# EAGLE board modbrainsv0.3x (EAGLE 7.1.0)

Size 63.17 x 80 mm. Coordinates in mm from the lower left corner, seen from the top.
Outline: 0,0 63.17,0 63.17,80 0,80 0,0
Copper layers (1*16): Top 0.035mm / dielectric 1.5mm / Bottom 0.035mm
Design rules "default": minimum track width 10mil, minimum drill 24mil, track to track 8mil, track to pad 8mil, pad to pad 8mil, via to via 8mil, smd to smd 8mil, copper to edge 40mil, drill to drill 8mil, minimum pad ring 10mil, minimum via ring 8mil, stop-mask expansion 4mil, vias tented up to drill 0mil, thermal gap 10mil
Net classes: 0 default: width 0.254 mm, drill 0.051 mm, clearance 0.254 mm

## Footprints (pad centres in the part's own frame; a part is rotated, then mirrored left to right if it is on the bottom)
2,54/1,1 = drill 1.118 pad 2.54 octagon: 1 0,0
0603-CAP = smd 1.1 x 1: 1 -0.85,0; 2 0.85,0
1206 = smd 1.6 x 1.8: 1 -1.4,0; 2 1.4,0
SMA-DIODE = smd 1.27 x 1.47: A -2.15,0; C 2.15,0
SOD-323 = smd 0.63 x 0.83: A 1.15,0; C -1.15,0
JST-2-SMD = smd 1 x 4.6: 1 -1,-3.7; 2 1,-3.7 | smd 1.6 x 3.4: NC1 -3.4,1.5; NC2 3.4,1.5
USB-B-MICRO-SMD_V03 = smd 1.4 x 0.4: D+1 2.7,0; D-1 2.7,0.65; GND1 2.7,-1.3; ID1 2.7,-0.65; VBUS1 2.7,1.3 | smd 1.5 x 1.8: SHIELD1 0,3.7; SHIELD2 0,-3.7 | smd 1.5 x 2.5: SHIELD3 0,0 | hole 0.85: 2.2,1.9; 2.2,-1.9
SOT23-3 = smd 0.8 x 0.9: 1 -0.95,-1; 2 0.95,-1; 3 0,1.1
0603-RES = smd 1.1 x 1: 1 -0.85,0; 2 0.85,0
SSOP16-PRACTICE = smd 0.4 x 1.5: 1 -2.223,-2.578; 2 -1.587,-2.578; 3 -0.953,-2.578; 4 -0.318,-2.578; 5 0.318,-2.578; 6 0.953,-2.578; 7 1.587,-2.578; 8 2.223,-2.578; 9 2.223,2.578; 10 1.587,2.578; 11 0.953,2.578; 12 0.318,2.578; 13 -0.318,2.578; 14 -0.953,2.578; 15 -1.587,2.578; 16 -2.223,2.578
SOT23-5 = smd 0.55 x 1.2: 1 -0.95,-1.3; 2 0,-1.3; 3 0.95,-1.3; 4 0.95,1.3; 5 -0.95,1.3
TQFP44 = smd 1.5 x 0.5: 1 -5.8,4; 2 -5.8,3.2; 3 -5.8,2.4; 4 -5.8,1.6; 5 -5.8,0.8; 6 -5.8,0; 7 -5.8,-0.8; 8 -5.8,-1.6; 9 -5.8,-2.4; 10 -5.8,-3.2; 11 -5.8,-4; 23 5.8,-4; 24 5.8,-3.2; 25 5.8,-2.4; 26 5.8,-1.6; 27 5.8,-0.8; 28 5.8,0; 29 5.8,0.8; 30 5.8,1.6; 31 5.8,2.4; 32 5.8,3.2; 33 5.8,4 | smd 0.5 x 1.5: 12 -4,-5.8; 13 -3.2,-5.8; 14 -2.4,-5.8; 15 -1.6,-5.8; 16 -0.8,-5.8; 17 0,-5.8; 18 0.8,-5.8; 19 1.6,-5.8; 20 2.4,-5.8; 21 3.2,-5.8; 22 4,-5.8; 34 4,5.8; 35 3.2,5.8; 36 2.4,5.8; 37 1.6,5.8; 38 0.8,5.8; 39 0,5.8; 40 -0.8,5.8; 41 -1.6,5.8; 42 -2.4,5.8; 43 -3.2,5.8; 44 -4,5.8
CRYSTAL-SMD-5X3 = smd 1.9 x 1.1: 1 -1.85,-1.15; 2 1.85,-1.15; 3 1.85,1.15; 4 -1.85,1.15

## Placement (x,y rotation side)
1+  [2,54/1,1]  54.61,40.64 0 top
1-  [2,54/1,1]  54.61,38.1 0 top
2+  [2,54/1,1]  54.61,35.56 0 top
2-  [2,54/1,1]  54.61,33.02 0 top
3+  [2,54/1,1]  54.61,30.48 0 top
3-  [2,54/1,1]  54.61,27.94 0 top
A2  [2,54/1,1]  36.83,59.69 0 top
A3  [2,54/1,1]  34.29,59.69 0 top
BTN  [2,54/1,1]  43.18,21.59 0 top
C1  1.0uF  [0603-CAP]  10.16,40.01 180 top
C2  22pF  [0603-CAP]  22.86,27.56 180 top
C3  22pF  [0603-CAP]  19.05,27.56 180 top
C4  0.1uF  [0603-CAP]  13.97,26.67 0 top
C5  0.1uF  [0603-CAP]  27.94,48.26 0 top
C6  0.1uF  [0603-CAP]  31.75,36.83 0 top
C7  4.7uF  [0603-CAP]  20.32,52.07 0 top
C8  4.7uF  [1206]  2.54,46.99 180 top
C9  470pF  [0603-CAP]  21.59,54.61 0 top
C10  4.7uF  [1206]  43.18,46.99 180 top
C11  0.1uF  [0603-CAP]  50.8,39.37 270 top
C12  0.1uF  [0603-CAP]  50.8,35.56 270 top
C13  0.1uF  [0603-CAP]  50.8,31.75 270 top
CHG+  [2,54/1,1]  1.27,52.07 0 top
CHG-  [2,54/1,1]  1.27,54.61 0 top
D1  B340A  [SMA-DIODE]  15.24,54.61 0 top
D2  BAT20JFILM  [SOD-323]  48.26,39.37 270 top
D3  BAT20JFILM  [SOD-323]  48.26,35.56 270 top
D4  1N914BWS  [SOD-323]  48.26,31.75 270 top
FRAME1  FRAME-LETTER  [CREATIVE_COMMONS]  21.59,-22.86 0 top  (outside the outline)
GND  [2,54/1,1]  1.27,27.94 0 top
GND13  [2,54/1,1]  34.29,10.16 0 top
GND15  [2,54/1,1]  38.1,10.16 0 top
GND17  [2,54/1,1]  41.91,10.16 0 top
GND19  [2,54/1,1]  45.72,10.16 0 top
J1  [JST-2-SMD]  53.34,46.99 270 top
JP4  USB  [USB-B-MICRO-SMD_V03]  2.54,40.64 0 top
LED+  [2,54/1,1]  35.56,43.18 0 top
OUT1  [2,54/1,1]  35.56,19.05 0 top
OUT2  [2,54/1,1]  38.1,20.32 0 top
Q1  [SOT23-3]  44.45,39.37 270 top
Q2  [SOT23-3]  44.45,35.56 270 top
Q3  [SOT23-3]  44.45,31.75 270 top
R1  10k  [0603-RES]  8.89,36.83 0 top
R2  430  [0603-RES]  31.75,43.18 0 top
R3  430  [0603-RES]  15.24,31.75 0 top
R4  430  [0603-RES]  27.94,59.69 0 top
R5  22  [0603-RES]  10.16,43.18 0 top
R6  22  [0603-RES]  10.16,45.09 0 top
R7  430  [0603-RES]  5.08,54.61 0 top
R8  10k  [0603-RES]  12.7,49.53 90 top
R9  1k  [0603-RES]  40.64,40.64 0 top
R10  1k  [0603-RES]  40.64,36.83 0 top
R11  1k  [0603-RES]  40.64,33.02 0 top
RST  [2,54/1,1]  10.16,33.02 0 top
RX+  [2,54/1,1]  1.27,33.02 0 top
RX-  [2,54/1,1]  30.48,59.69 0 top
SW1  [2,54/1,1]  43.18,59.69 0 top
SW2  [2,54/1,1]  20.32,60.96 0 top
TX+  [2,54/1,1]  1.27,30.48 0 top
TX-  [2,54/1,1]  10.16,29.21 0 top
U1  74CBTLV3253  [SSOP16-PRACTICE]  33.02,31.75 90 top
U2  MIC5219 3.3V  [SOT23-5]  25.4,50.8 270 top
U3  MCP73831  [SOT23-5]  8.89,48.26 90 top
U$1  ATMEGA32U4TQFP-44  [TQFP44]  21.59,40.64 0 top
VCC  [2,54/1,1]  6.35,33.02 0 top
Y1  [CRYSTAL-SMD-5X3]  21.59,30.48 0 top

## Library data of the parts
1+ 1- 2+ 2- 3+ 3- A2 A3 BTN CHG+ CHG- GND GND13 GND15 GND17 GND19 LED+ OUT1 OUT2 RST RX+ RX- SW1 SW2 TX+ TX- VCC = wirepad
C1 = SparkFun-Capacitors; PROD_ID: CAP-00868
C2 C3 = SparkFun-Capacitors; PROD_ID: CAP-07876
C4-C8 C10 R1 R5-R11 = SparkFun-Passives
C9 C11-C13 = SparkFun-Capacitors; PROD_ID: CAP-00810
D1 = SparkFun-DiscreteSemi; PROD_ID: DIO-09886
D2-D4 = SparkFun-DiscreteSemi; PROD_ID: DIO-11623
FRAME1 = SparkFun-Aesthetics
J1 = SparkFun-Connectors; PROD_ID: CONN-08352
JP4 = SparkFun-Connectors
Q1-Q3 = SparkFun-DiscreteSemi; PROD_ID: TRANS-08049
R2-R4 = SparkFun-Resistors
U1 U$1 = SparkFun-DigitalIC
U2 = SparkFun-PowerIC; PROD_ID: VREG-09872
U3 = SparkFun-PowerIC; PROD_ID: IC-09995
Y1 = SparkFun-FreqCtrl; PROD_ID: XTAL-08218

## Nets
3.3V: RX+.1 TX+.1 U2.5 VCC.1
A4: U$1.40
A5: U$1.41
A7: U1.6 U$1.27
A8: U1.10 U$1.29
BVCC: 1+.1 2+.1 3+.1 C10.1 C11.1 C12.1 C13.1 D1.A D2.C D3.C D4.C J1.2 U3.3
D+: R6.2 U$1.4
D-: R5.2 U$1.3
GND: C1.2 C2.1 C3.1 C4.2 C5.2 C6.2 C7.2 C8.2 C9.2 C10.2 GND13.1 GND15.1 GND17.1 GND19.1 GND.1 J1.1 JP4.GND1 Q1.2 Q2.2 Q3.2 U1.1 U1.8 U1.15 U$1.5 U$1.15 U$1.23 U$1.33 U$1.35 U$1.43
MISO: U1.12 U$1.11
MOTOR1: R9.1 U$1.31
MOTOR2: R10.1 U$1.30
MOTOR3: R11.1 U$1.12
MUX0: U1.14 U$1.28
MUX1: U1.2 U$1.26
N$1: C2.2 U$1.17 Y1.3
N$2: C3.2 U$1.16 Y1.1
N$3: R1.2 RST.1 U$1.13
N$4: R2.1 U$1.32
N$5: R4.1 U$1.8
N$6: R3.1 U$1.22
N$7: LED+.1 R2.2
N$8: R4.2 RX-.1
N$9: R3.2 TX-.1
N$10: JP4.D+1 R5.1
N$11: JP4.D-1 R6.1
N$12: U3.5
N$13: OUT2.1 U1.9
N$14: OUT1.1 U1.7
N$15: A2.1 U$1.38
N$16: A3.1 U$1.39
N$17: BTN.1 U$1.25
N$18: R7.1 U3.1
N$19: CHG-.1 R7.2
N$20: R8.2 U2.2 U3.2
N$21: SW2.1 U2.3
N$22: C9.1 U2.4
N$24: 1-.1 C11.2 D2.A Q1.3
N$25: 2-.1 C12.2 D3.A Q2.3
N$26: 3-.1 C13.2 D4.A Q3.3
N$27: Q1.1 R9.2
N$28: Q2.1 R10.2
N$29: Q3.1 R11.2
RX: U$1.20
SCK: U1.4 U$1.9
SCL: U1.11 U$1.18
SDA: U1.5 U$1.19
TX: U$1.21
UVCC: C8.1 CHG+.1 D1.C JP4.VBUS1 SW1.1 U2.1 U3.4 U$1.7
VCC: C1.1 C4.1 C5.1 C6.1 C7.1 R1.1 U1.16 U$1.6 U$1.14 U$1.24 U$1.34 U$1.42 U$1.44

## Tracks (layer width: path | path; a pad name or v marks a point on that pad's centre or on a via)
3.3V  (3 unrouted)
A7  (1 unrouted)
A8  (1 unrouted)
BVCC  (12 unrouted)
D+  (1 unrouted)
D-  (1 unrouted)
GND  (28 unrouted)
MISO  (1 unrouted)
MOTOR1  (1 unrouted)
MOTOR2  (1 unrouted)
MOTOR3  (1 unrouted)
MUX0  (1 unrouted)
MUX1  (1 unrouted)
N$1  (2 unrouted)
N$2  (2 unrouted)
N$3  (2 unrouted)
N$4  (1 unrouted)
N$5  (1 unrouted)
N$6  (1 unrouted)
N$7  (1 unrouted)
N$8  (1 unrouted)
N$9  (1 unrouted)
N$10  (1 unrouted)
N$11  (1 unrouted)
N$13  (1 unrouted)
N$14  (1 unrouted)
N$15  (1 unrouted)
N$16  (1 unrouted)
N$17  (1 unrouted)
N$18  (1 unrouted)
N$19  (1 unrouted)
N$20  (2 unrouted)
N$21  (1 unrouted)
N$22  (1 unrouted)
N$24  (3 unrouted)
N$25  (3 unrouted)
N$26  (3 unrouted)
N$27  (1 unrouted)
N$28  (1 unrouted)
N$29  (1 unrouted)
SCK  (1 unrouted)
SCL  (1 unrouted)
SDA  (1 unrouted)
UVCC  (7 unrouted)
VCC  (12 unrouted)